# Altium PCB PCB1.PcbDoc
Units mm, origin at the board's own origin, x right, y up, seen from the top; angles counter-clockwise.
Board outline 40 x 35 mm, 2 copper layers (Top Layer, Bottom Layer), stack 1.6 mm thick; 41 components, 31 nets, 130 pads, 27 vias.
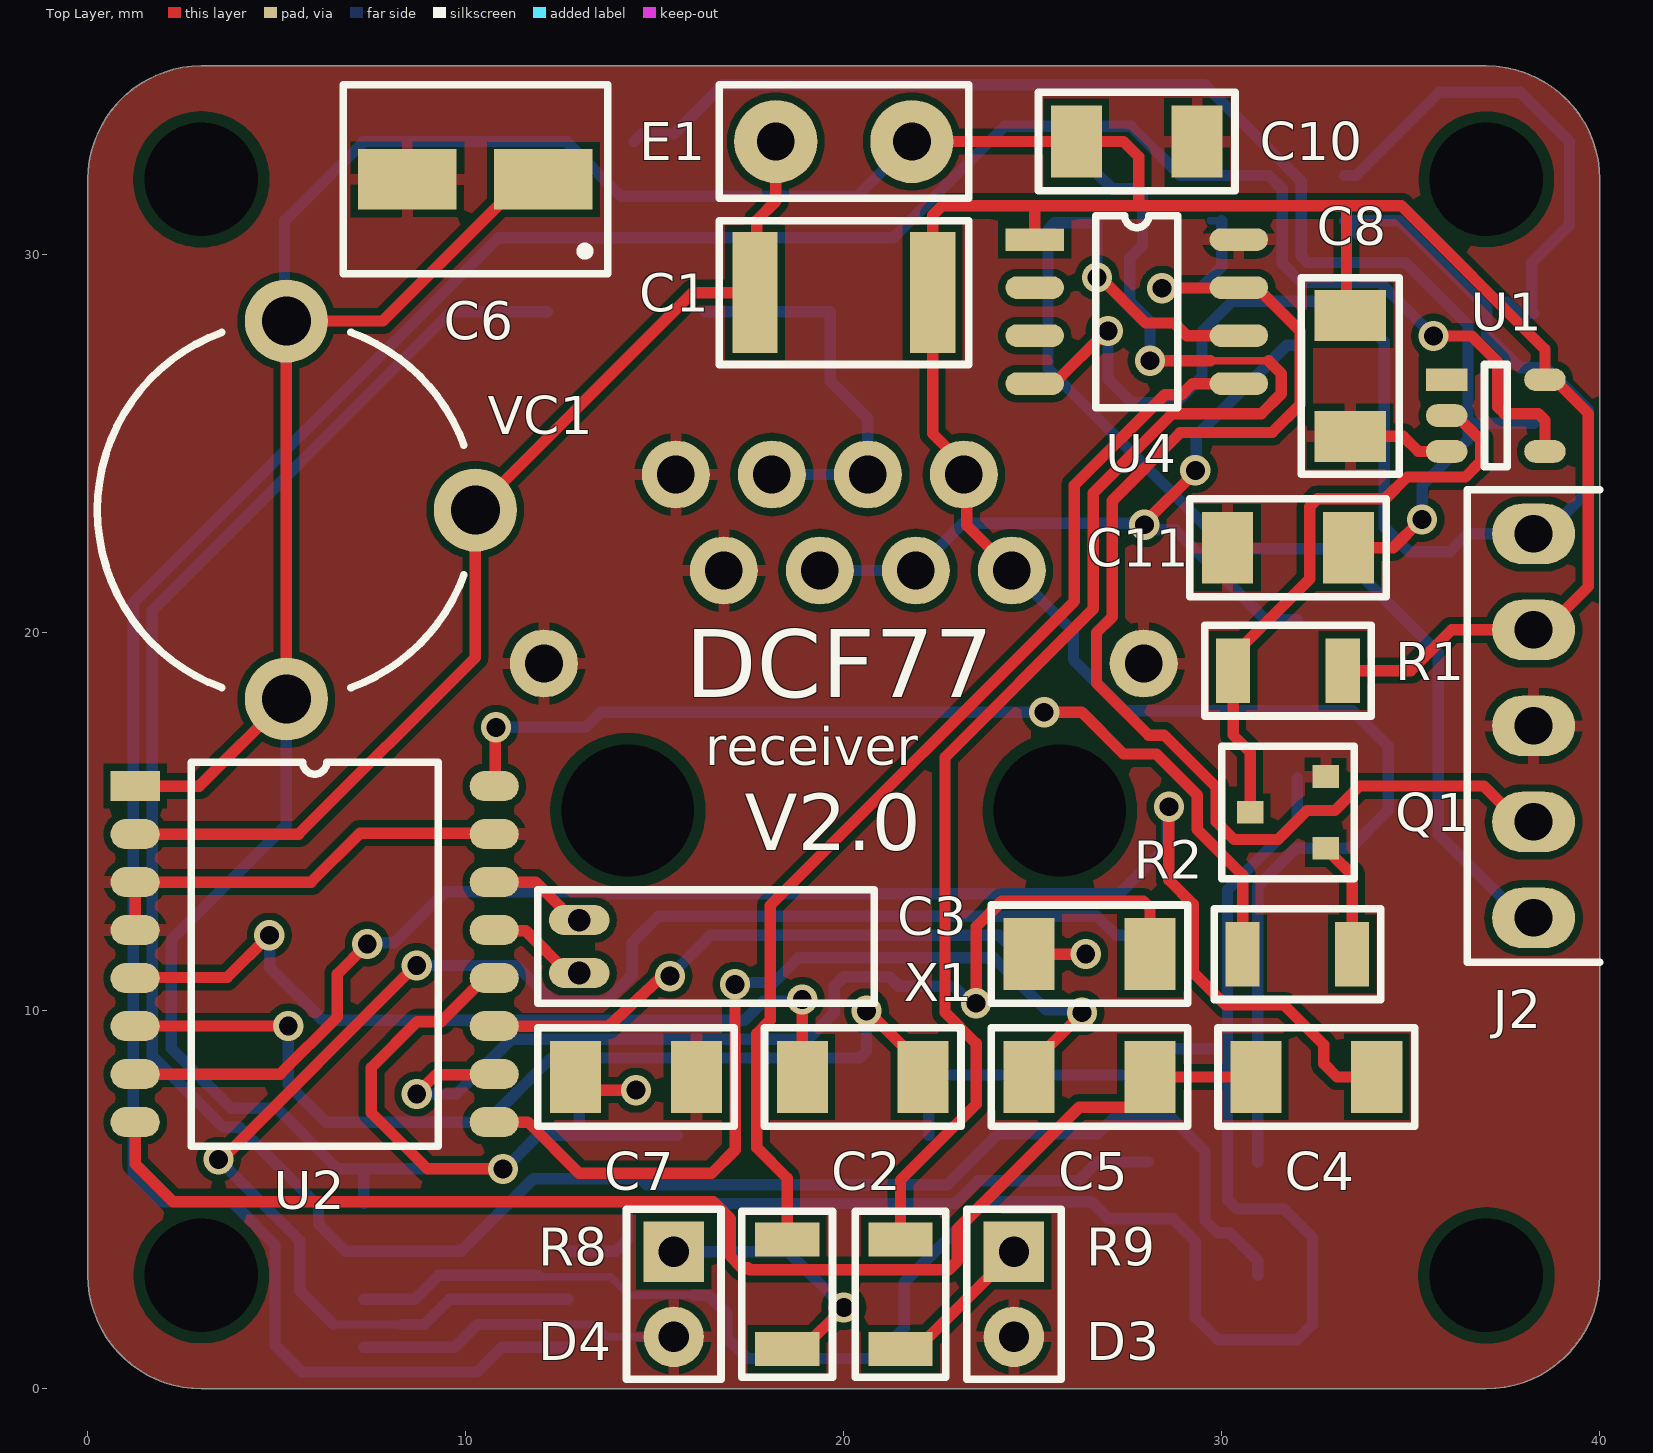
[diagram p0: Top Layer view]
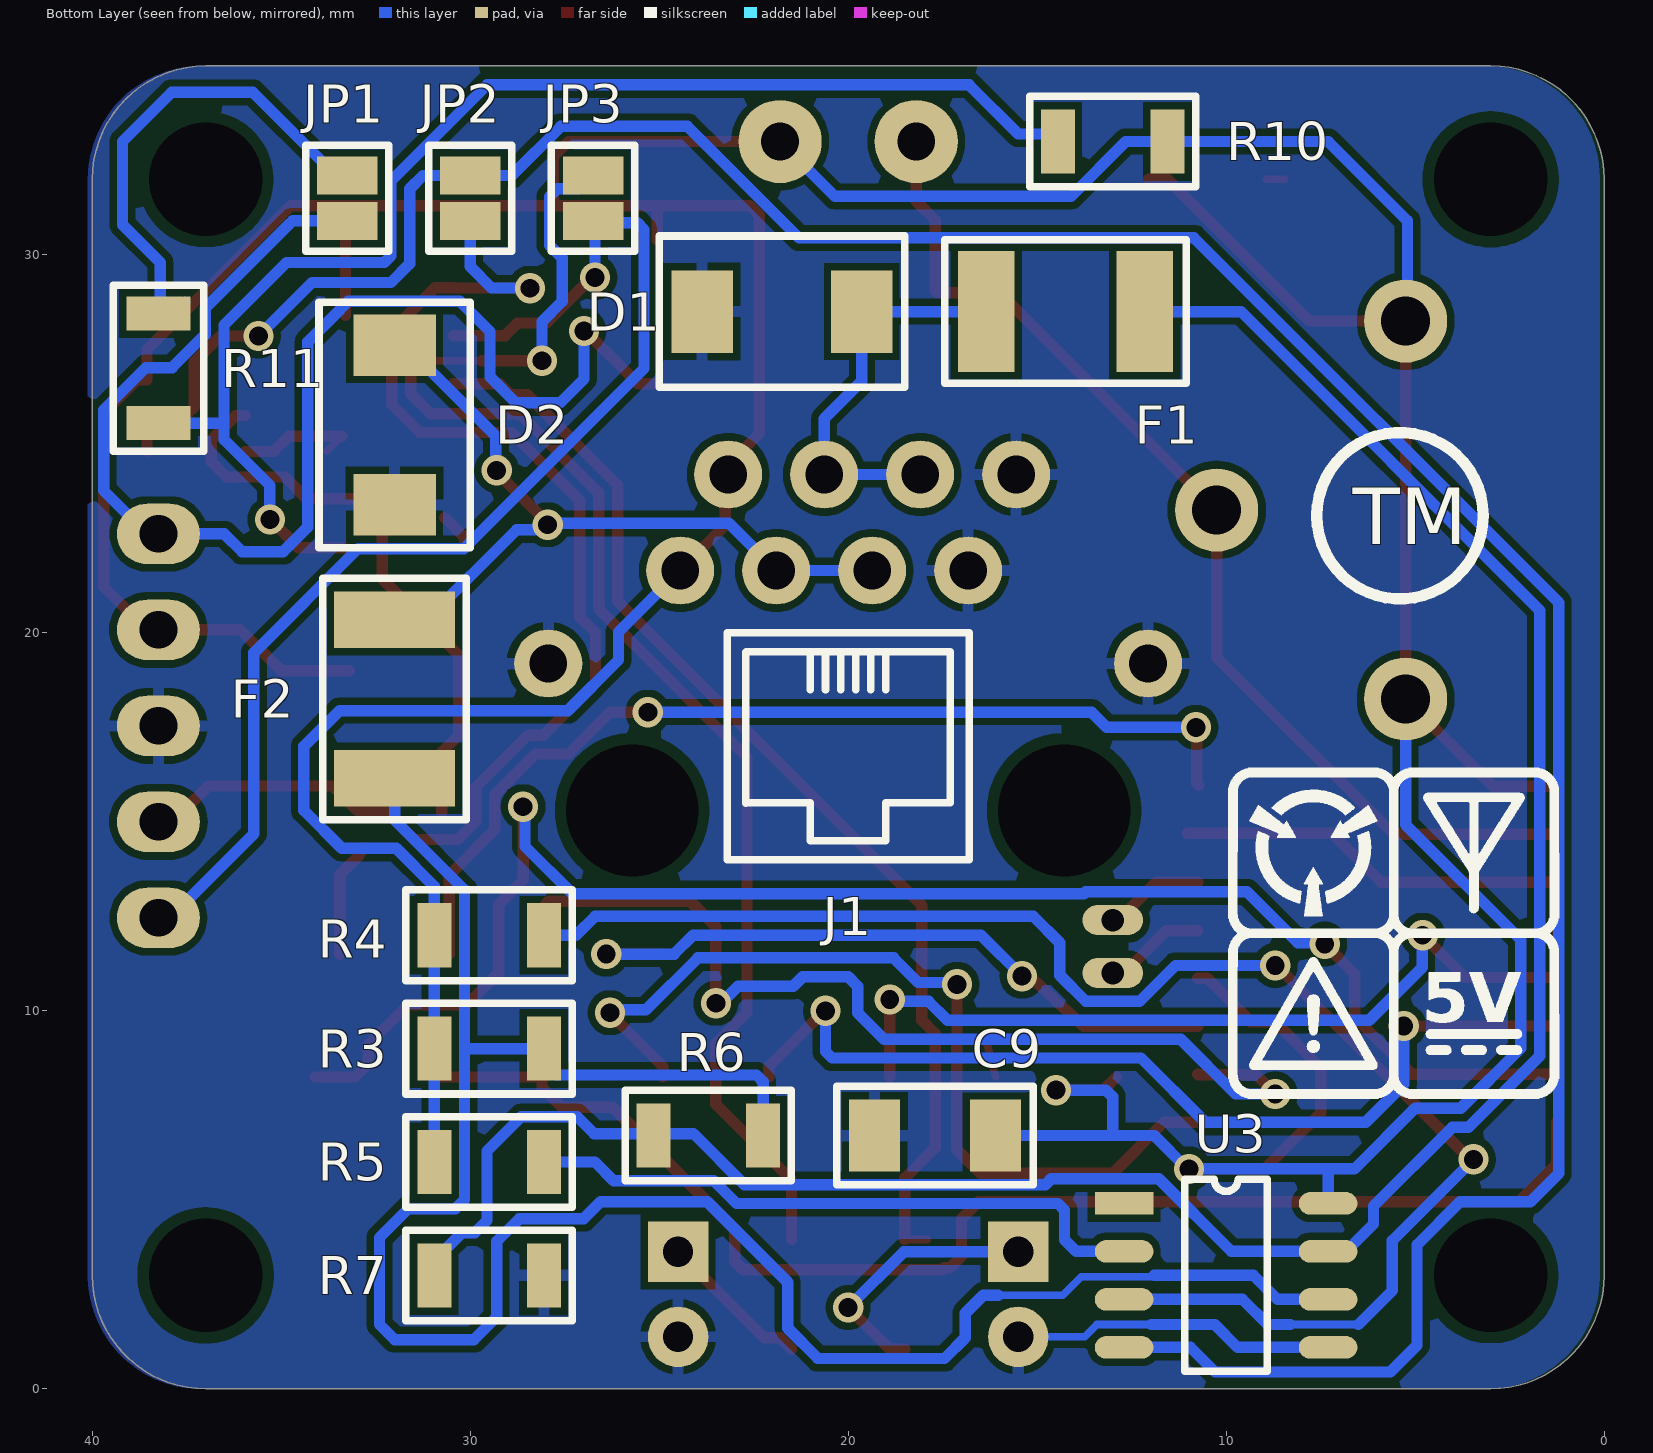
[diagram p1: Bottom Layer view, seen from below]
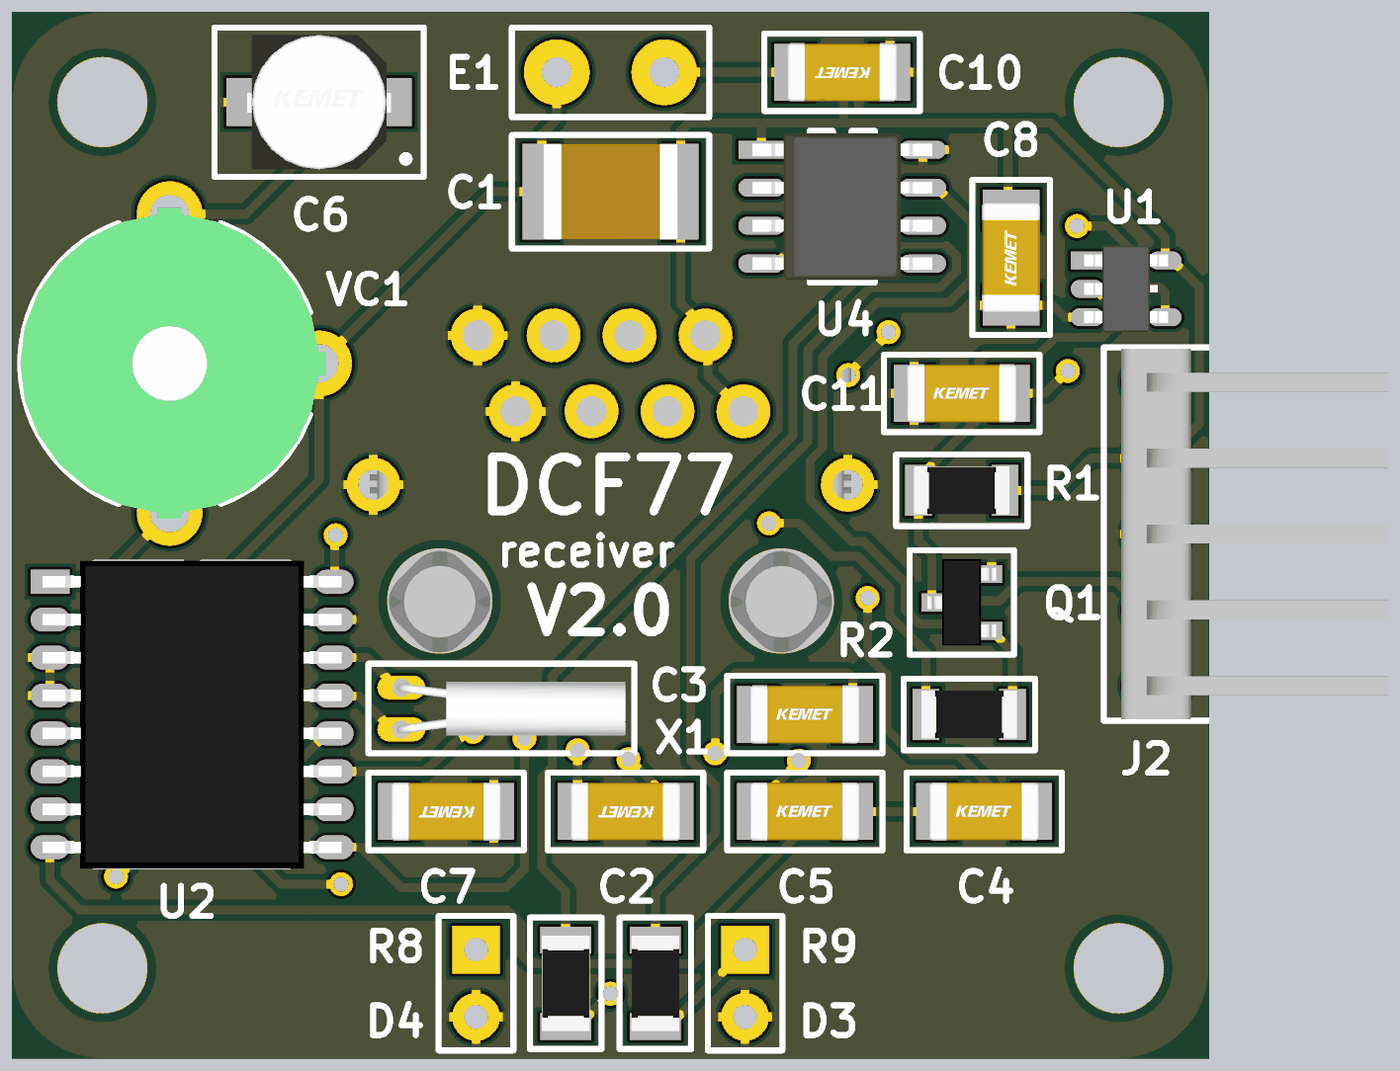
[diagram p2: 3D render of the assembled board from above, using the file's embedded part models]
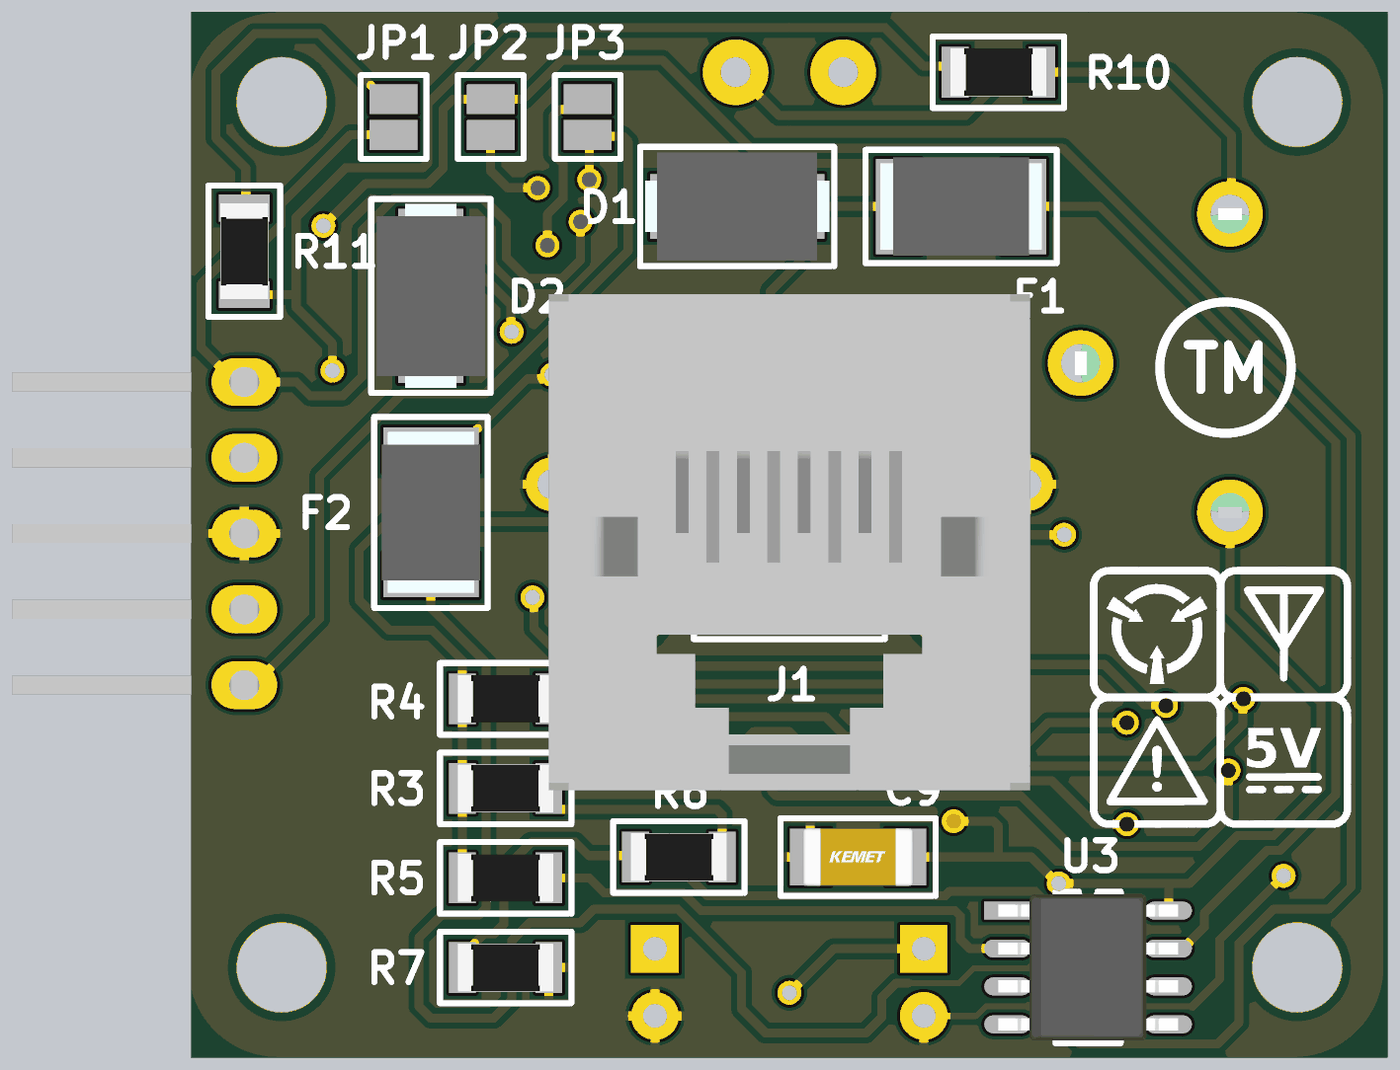
[diagram p3: 3D render of the assembled board from below, using the file's embedded part models]

## Layer stack, top to bottom
Top Solder: solder mask 0.0102, Solder Resist, Dk 3.5
Top Layer: signal copper 0.05
Dielectric 1: dielectric 1.5, FR-4, Dk 4.8
Bottom Layer: signal copper 0.05
Bottom Solder: solder mask 0.0102, Solder Resist, Dk 3.5

## Board outline
0,3 0,32 cw(c3,32) 3,35 37,35 cw(c37,32) 40,32 40,3 cw(c37,3) 37,0 3,0 cw(c3,3)

## Design rules (kind name [scope] priority, off if disabled: settings)
Clearance [All] p1: gap=0.2 ignorepadtopadclearanceinfootprint=FALSE except(0.3: Arc-Hole Track-Hole SMDPad-Hole THPad-Hole Via-Hole Fill-Hole Poly-Hole Region-Hole Text-Hole)
HoleSize [All] p1: absolutevalues=TRUE maxlimit=5 minlimit=0.025 maxpercent=80.000 minpercent=20.000
HoleToHoleClearance [All] p1: gap=0.2 allowstackedmicrovias=TRUE
MinimumSolderMaskSliver [All] p1: minsoldermaskwidth=0.15
PlaneConnect [All] p1: planeconnectstyle=Relief reliefexpansion=0.4 reliefentries=4 reliefconductorwidth=0.4 reliefairgap=0.3
PolygonConnect [All] p1: connectstyle=Relief reliefconductorwidth=0.3 reliefentries=4 polygonreliefangle="90 Angle" airgapwidth=0.2
RoutingVias [All] p1: holewidth=0.6 width=1 viastyle="Through Hole" minholewidth=0.5 minwidth=0.8 maxholewidth=0.6 maxwidth=1
SilkToSilkClearance [All] p1: silktosilkclearance=0.2
SilkToSolderMaskClearance [IsPad] p1: minsilkscreentomaskgap=0.2 clearancetoexposedcopper=TRUE
SolderMaskExpansion [All] p1: expansion=0.1 istentingtop=FALSE
Width [All] p1: maxlimit=0.3 minlimit=0.2 preferedwidth=0.3
24 further rules are at their usual default settings.

## Components (designator, comment, footprint, x,y, rotation, side; value= is the part's Value field where it differs from the comment)
C1 "Capacitator_film" FILM_CAPACITATOR 20,29 r0 top value=33nF
C2 "Capacitator_MLCC" MLCC_CAPACITATOR 20.5,8.25 r180 top value=10pF
C3 "Capacitator_MLCC" MLCC_CAPACITATOR 26.5,11.5 r0 top value=10nF
C4 "Capacitator_MLCC" MLCC_CAPACITATOR 32.5,8.25 r0 top value=6.8nF
C5 "Capacitator_MLCC" MLCC_CAPACITATOR 26.5,8.25 r0 top value=33nF
C6 "Capacitator_aluminium" CAPACITATOR_ALUMINIUM 10.25,32 r180 top value=10uF
C7 "Capacitator_MLCC" MLCC_CAPACITATOR 14.5,8.25 r180 top value=100nF
C8 "Capacitator_MLCC" MLCC_CAPACITATOR 33.4,26.8 r90 top value=100nF
C9 "Capacitator_MLCC" MLCC_CAPACITATOR 17.7,6.7 r180 bottom value=100nF
C10 "Capacitator_MLCC" MLCC_CAPACITATOR 27.75,33 r180 top value=100nF
C11 "Capacitator_MLCC" MLCC_CAPACITATOR 31.75,22.25 r0 top value=10nF
D1 "SMP75" SMP75 21.75,28.5 r0 bottom
D2 "SMP75" SMP75 32,25.5 r270 bottom
D3 "Indication_led" INDICATION_LED 24.5,2.5 r270 top
D4 "Indication_led" INDICATION_LED 15.5,2.5 r270 top
E1 "Ferrite_antenna" ANTENNA 20,33 r180 top value=128uH
F1 "PFMF.020.2" PFMF.020.2 14.25,28.5 r0 bottom
F2 "PFMF.020.2" PFMF.020.2 32,18.25 r90 bottom
J1 "Ethernet_connector" ETHERNET_CONNECTOR 20,17.5 r180 bottom
J2 "Programmer_port" Programmer_port 38.25,17.54 r0 top
JP1 "Jumper" JUMPER 33.25,31.5 r270 bottom
JP2 "Jumper" JUMPER 30,31.5 r270 bottom
JP3 "Jumper" JUMPER 26.75,31.5 r270 bottom
Q1 "BC847" BC847 31.75,15.25 r270 top
R1 "Resistor" RESISTOR 31.75,19 r0 top value=10k
R2 "Resistor" RESISTOR 32,11.5 r0 top value=100k
R3 "Resistor" RESISTOR 29.5,9 r0 bottom value=20k
R4 "Resistor" RESISTOR 29.5,12 r0 bottom value=10k
R5 "Resistor" RESISTOR 29.5,6 r0 bottom value=10k
R6 "Resistor" RESISTOR 23.7,6.7 r0 bottom value=120R
R7 "Resistor" RESISTOR 29.5,3 r0 bottom value=20k
R8 "Resistor" RESISTOR 21.5,2.5 r270 top value=330R
R9 "Resistor" RESISTOR 18.5,2.5 r90 top value=330R
R10 "Resistor" RESISTOR 13,33 r180 bottom value=10k
R11 "Resistor" RESISTOR 38.25,27 r90 bottom value=330R
U1 "SN74AHCT1G14" SN74AHCT1G14 37.25,25.75 r0 top
U2 "U4224B" U422B 6,11.5 r0 top
U3 "SN75176A" SN75176A 10,3 r180 bottom
U4 "PIC16F15214" PIC16F15214 27.75,28.5 r0 top
VC1 "Trimmer_capacitator" TRIMMER_CAPACITATOR 5.25,23.25 r90 top value="5.5pF - 40pF"
X1 "Crystal" CRYSTAL 13,11.7 r270 top value=77.5kHz

## Footprints (in the part's own frame and the unit in brackets; to place one, negate y for a bottom-side part, rotate by r counter-clockwise, add the part's x,y. Pads: shape width x height; smd on the part's side, far side on the other; paste and mask are expansions set on the pad)
ANTENNA [mm]
  round 2.2 hole 1: 1(-1.8,0) 2(1.8,0)
  silkscreen extent -3.3,-1.5 3.3,1.5
BC847 [mm]
  rect 0.6x0.7 smd: 1(0.95,1) 2(-0.95,1) 3(0,-1)
  silkscreen extent -1.75,-1.75 1.75,1.75, body extent -1.45,-1.15 1.45,1.15, height 1.01
CAPACITATOR_ALUMINIUM [mm]
  rect 2.6x1.6 smd: 1(-1.8,0) 2(1.8,0)
  silkscreen extent -3.5,-2.5 3.5,2.5, body extent -2.4,-2.25 2.4,2.25, height 5.66
CRYSTAL [mm]
  oval 0.8x1.6 hole 0.6: 1(-0.7,0) 2(0.7,0)
  silkscreen extent -1.5,-1.1 1.5,7.8, body extent -0.9,-0.15 0.89,7.5, height 1.8
ETHERNET_CONNECTOR [mm]
  round 1.8 hole 1: 1(-4.445,4.15) 2(-3.175,6.69) 3(-1.905,4.15) 4(-0.635,6.69) 5(0.635,4.15) 6(1.905,6.69) 7(3.175,4.15) 8(4.445,6.69) 9(-7.935,1.69) 10(7.935,1.69)
  round 0 hole 3.5: 22(-5.715,-2.2) 22(5.715,-2.2)
  silkscreen extent -3.2,-3.5 3.2,2.5, body extent -8.06,-8.57 8.06,8.07, height 16.83
FILM_CAPACITATOR [mm]
  rect 1.2x3.2 smd: 1(-2.35,0) 2(2.35,0)
  silkscreen extent -3.3,-1.9 3.3,1.9, body extent -2.25,-1.6 2.25,1.6, height 1
INDICATION_LED [mm]
  rect 1.6x1.6 hole 0.8: 1(-1.125,0)
  round 1.6 hole 0.8: 2(1.125,0)
  silkscreen extent -2.25,-1.25 2.25,1.25
JUMPER [mm]
  rect 1x1.6 smd: 1(-0.6,0) 2(0.6,0)
  silkscreen extent -1.4,-1.1 1.4,1.1
MLCC_CAPACITATOR [mm]
  rect 1.35x1.9 smd: 1(-1.6,0) 2(1.6,0)
  silkscreen extent -2.6,-1.3 2.6,1.3, body extent -1.85,-0.97 1.85,0.98, height 1.21
PFMF.020.2 [mm]
  rect 1.5x3.2 smd: 1(-2.1,0) 2(2.1,0)
  silkscreen extent -3.2,-1.9 3.2,1.9, body extent -2.7,-1.65 2.7,1.65, height 1.2
PIC16F15214 [mm]
  rect 1.55x0.6 smd: 1(-2.7,1.905)
  oval 1.55x0.6 smd: 2(-2.7,0.635) 3(-2.7,-0.635) 4(-2.7,-1.905) 5(2.7,-1.905) 6(2.7,-0.635) 7(2.7,0.635) 8(2.7,1.905)
  silkscreen extent -1.09,-2.54 1.09,2.54, body extent -3.01,-2.45 3.01,2.45, height 1.63
Programmer_port [mm]
  oval 2.2x1.6 hole 1: 1(0,5.08) 2(0,2.54) 3(0,0) 4(0,-2.54) 5(0,-5.08)
  silkscreen extent -1.75,-6.25 1.75,6.25, body extent -1.17,-6.2 7.77,6.2, height 6.68
RESISTOR [mm]
  rect 0.9x1.7 smd: 1(-1.45,0) 2(1.45,0)
  silkscreen extent -2.2,-1.2 2.2,1.2, body extent -1.6,-0.8 1.6,0.8, height 0.56
SMP75 [mm]
  rect 1.62x2.18 smd: 1(-2.11,0) 2(2.11,0)
  silkscreen extent -3.25,-2 3.25,2, body extent -3.08,-1.81 3.09,1.81, height 2.75
SN74AHCT1G14 [mm]
  rect 1.1x0.6 smd: 1(-1.3,0.95)
  oval 1.1x0.6 smd: 2(-1.3,0) 3(-1.3,-0.95) 4(1.3,-0.95) 5(1.3,0.95)
  silkscreen extent -0.3,-1.35 0.3,1.35, body extent -1.4,-1.45 1.4,1.45, height 1.2
SN75176A [mm]
  rect 1.55x0.6 smd: 1(-2.7,1.905)
  oval 1.55x0.6 smd: 2(-2.7,0.635) 3(-2.7,-0.635) 4(-2.7,-1.905) 5(2.7,-1.905) 6(2.7,-0.635) 7(2.7,0.635) 8(2.7,1.905)
  silkscreen extent -1.09,-2.54 1.09,2.54, body extent -3.01,-2.45 3.01,2.45, height 1.63
TRIMMER_CAPACITATOR [mm]
  round 2.2 hole 1.3: 1(-5,0) 1(5,0) 2(0,-5)
  silkscreen extent -4.7,-4.7 4.7,5, body extent -5.2,-5.2 5.2,5, height 11.01
U422B [mm]
  rect 1.3x0.8 smd: 1(-4.75,4.445)
  oval 1.3x0.8 smd: 2(-4.75,3.175) 3(-4.75,1.905) 4(-4.75,0.635) 5(-4.75,-0.635) 6(-4.75,-1.905) 7(-4.75,-3.175) 8(-4.75,-4.445) 9(4.75,-4.445) 10(4.75,-3.175) 11(4.75,-1.905) 12(4.75,-0.635) 13(4.75,0.635) 14(4.75,1.905) 15(4.75,3.175) 16(4.75,4.445)
  silkscreen extent -3.26,-5.08 3.27,5.08, body extent -5,-5.15 5,5.15, height 2.2

## Part data
C1: "Film capacitator", Supplier Part Number 1=505-SMDID02330KA00KP, Supplier 1=Mouser
C2 C3 C4 C5 C7 C8 C9 C10 C11: "MLCC capacitator - 1206"
C6: "Aluminum capacitator - filtration", Supplier 1=Mouser, Supplier 2=Mouser, Supplier 3=Mouser, Supplier Part Number 3=80-EDK106M035A9BAA
D1 D2: "Bidirectional crowbar protection", Supplier Part Number 1=511-SMP75-8, Supplier 1=Mouser
D3 D4: "Indication led to panel", Supplier Part Number 1=593-L63DR2L, Supplier 1=Mouser
E1: "Ferrite antenna"
F1 F2: "SMD fuse", Supplier Part Number 1=693-PFMF.020.2, Supplier 1=Mouser
J1: "Ethernet connector", Supplier Part Number 1=571-6368150-1, Supplier 1=Mouser
J2: "Programmer port for PIC"
JP1 JP2 JP3: "Solderable jumper"
Q1: "NPN transistor", Supplier Part Number 1=771-BC847215, Supplier 1=Mouser
R1 R2 R3 R4 R5 R6 R7 R8 R9 R10 R11: "SMD resistor - 1206"
U1: "SINGLE SCHMITT-TRIGGER INVERTER GATE", Supplier Part Number 1=595-SN74AHCT1G14DBVR, Supplier 1=Mouser
U2: "DCF77 signal decoder"
U3: "RS485 transreciever", Supplier Part Number 1=595-SN75176ADR, Supplier 1=Mouser
U4: "8-bit microcontroller", Supplier Part Number 1=579-PIC16F15214-I/SN, Supplier 1=Mouser
VC1: "Film dielectric trimmer", Supplier Part Number 1=594-2222-808-31409, Supplier 1=Mouser
X1: "Quartz crystal"

## Free pads (board coordinates)
  round 0 hole 3: 36(3,3) 36(3,32) 36(37,3) 36(37,32)

## Via types
v1: diameter 0.8, hole 0.5, Top Layer to Bottom Layer, 27 vias

## Nets (pads, with @x,y where several pads share a name; then routed paths per layer and width w, separated by ;. In a path a pad name is that pad's centre, name@x,y a point inside that pad or via, vN(x,y) a via of type N, cw(c..) or ccw(c..) an arc to the next point about the centre after c; other vN are vias at no path point)
GND: C6.2 C7.1 C8.1 C9.1 C10.1 C11.1 D1.2 D2.2 D3.2 D4.2 J1.7 J1.8 J1.9 J1.10 J2.3 Q1.2 R7.1 U1.3 U2.3 U2.4 U2.15 U3.5 U4.8 | length 26
  Top Layer w0.2: C6.2 C6.2@8.941,32 ; C7.1 C7.1@16.32,9.1 ; C8.1 C8.1@33.8,24.8
  Top Layer w0.3: U2.4 U2.3 5.905,13.405 7.2,14.7 U2.15@11.025,14.7 ; C11.1 30.15,22.525 C11.1@30.675,23.05 ; C8.1 34.8,25.2 35.2,24.8 U1.3
  Bottom Layer w0.2: 11.985,1.7 13.419,1.7 13.744,1.375 D4.2 ; D3.2@24.342,1.375 D3.2
  Bottom Layer w0.3: U3.5 9.695,1.095 10.3,1.7 11.985,1.7
NetC1_1: C1.1 E1.2 U2.2 VC1.2 | length 28.8
  Top Layer w0.3: U2.2 5.575,14.675 10.25,19.35 VC1.2 16,29 C1.1 17.7,29.05 17.7,30.921 18.2,31.421 E1.2
NetC2_1: C2.1 U2.6 | length 25.6
  Top Layer w0.3: U2.6 1.252,9.598 5.298,9.598 v1(5.3,9.6) ; v1(20.6,10) 20.625,10 22.1,8.525 C2.1
  Bottom Layer w0.3: v1(5.3,9.6) 5.3,8.054 6.304,7.05 10.55,7.05 12.25,8.75 20.424,8.75 20.6,8.926 v1(20.6,10)
NetC2_2: C2.2 U2.5 | length 21.8
  Top Layer w0.3: U2.5 1.267,10.883 3.683,10.883 v1(4.8,12) ; C2.2 v1(18.9,10.3)
  Bottom Layer w0.3: v1(4.8,12) 4.811,11.989 4.811,11.15 6.211,9.75 17.372,9.75 17.872,10.25 18.85,10.25 v1(18.9,10.3)
NetC3_1: C3.1 U2.11 | length 18.4
  Top Layer w0.3: U2.11 13.771,9.595 15.309,11.016 15.4,10.925 v1(15.4,10.917) ; C3.1 v1(26.4,11.5)
  Bottom Layer w0.3: v1(15.4,10.917) 16.483,12 24.105,12 24.605,11.5 v1(26.4,11.5)
NetC3_2: C3.2 U2.10 | length 27.3
  Top Layer w0.3: v1(8.7,7.8) 9.213,8.313 10.737,8.313 U2.10 ; v1(23.5,10.2) 23.5,12.22 24.18,12.9 27.924,12.9 28.1,12.724 C3.2
  Bottom Layer w0.3: v1(8.7,7.8) 9.75,7.8 11.2,9.25 19.052,9.25 19.75,9.948 19.75,10.652 19.998,10.9 21.202,10.9 21.452,10.65 22.915,10.65 23.365,10.2 v1(23.5,10.2)
NetC4_1: C4.1 C5.2 U2.8 | length 35.3
  Top Layer w0.3: U2.8 1.25,5.95 2.25,4.95 16.55,4.95 17.001,4.499 17.001,3.499 17.3,3.2 17.455,3.2 17.505,3.15 22.774,3.15 23,3.376 23,4.22 26.23,7.45 27.575,7.45 28.1,7.975 C5.2 C4.1
NetC4_2: C4.2 U2.7 | length 42.5
  Top Layer w0.3: U2.7 5.086,8.325 6.6,9.839 6.6,10.976 v1(7.391,11.767) ; v1(28.6,15.4) 28.6,13.46 29.244,12.815 29.244,11.011 30.1,10.155 31.645,10.155 32.7,9.1 32.7,8.6 33.05,8.25 C4.2
  Bottom Layer w0.3: v1(7.391,11.767) 7.426,11.802 8.102,11.802 9.45,13.15 13.711,13.15 13.761,13.1 27.3,13.1 28.549,14.349 28.549,15.349 v1(28.6,15.4)
NetC5_1: C5.1 U2.9 | length 23.9
  Top Layer w0.3: U2.9 11.645,7.055 13,5.7 16.5,5.7 17.125,6.325 17.125,9.345 17.12,9.35 v1(17.12,10.7) ; C5.1 24.9,8.525 26.3,9.925 v1(26.3,9.95)
  Bottom Layer w0.3: v1(17.12,10.7) 17.17,10.75 18.148,10.75 18.798,11.4 23.977,11.4 25.35,10.027 26.223,10.027 v1(26.3,9.95)
NetC11_2: C11.2 R10.1 R11.1 | length 36.1
  Top Layer w0.3: C11.2 34.536,22.25 35.286,23 v1(35.3,23)
  Bottom Layer w0.3: R10.1 14.65,33.2 15.5,33.2 16.8,34.5 29.557,34.5 32.1,31.957 32.1,29.976 32.276,29.8 34.856,29.8 36.513,28.143 36.513,25.6 ; v1(35.3,23) 35.3,23.9 36.513,25.113 36.513,25.6 ; R11.1 36.563,25.55 36.513,25.6
NetD1_1: D1.1 F1.2 J1.4 J1.6 | length 10.6
  Bottom Layer w0.3: F1.2 D1.1 19.64,26.66 20.635,25.665 J1.4 J1.6
NetD2_1: D2.1 F2.2 J1.3 J1.5 | length 20.9
  Top Layer w0.3: v1(27.95,22.86) 27.95,22.905 29.3,24.255 v1(29.3,24.3)
  Bottom Layer w0.3: J1.5 J1.3 23.155,22.9 27.91,22.9 v1(27.95,22.86) ; v1@27.851,22.86 27.985,22.726 28.774,22.726 31.15,20.35 F2.2 ; v1(29.3,24.3) 29.323,24.323 29.323,25.213 31.06,26.95 31.72,27.61 D2.1
NetD3_1: D3.1 R8.2 | length 4.1
  Top Layer w0.3: R8.2 21.8,1.35 22.225,1.35 D3.1
NetD4_1: D4.1 R9.1 | length 7.9
  Top Layer w0.3: R9.1 18.9,1.05 v1(20,2.15)
  Bottom Layer w0.2: D4.1 D4.1@16.083,3.042
  Bottom Layer w0.3: D4.1 18.525,3.625 v1(20,2.15)
NetF1_1: F1.1 R6.2 R7.2 U3.7 | length 61.8
  Bottom Layer w0.3: F1.1 9.607,28.5 1.7,20.593 1.7,8.806 3.585,6.921 4.014,6.921 6.1,4.835 6.1,4.36 6.825,3.635 9.86,3.635 11.78,5.555 14.625,5.555 14.78,5.4 22.745,5.4 24.095,6.75 25.15,6.75 26.722,6.75 27.172,7.2 28.645,7.2 29.557,6.288 29.557,4.45 29.883,4.124 30.226,4.124 30.95,3.4 R7.2
NetF2_1: F2.1 R3.1 R6.1 U3.6 | length 58.7
  Bottom Layer w0.2: 11.9,3 11.935,2.965 13.835,2.965 14.325,2.475 15.956,2.475 ; 15.956,2.475 16.026,2.475
  Bottom Layer w0.3: U3.6 8.639,2.365 9.274,3 11.9,3 ; 16.026,2.475 16.425,2.475 16.9,2 16.9,1.349 17.449,0.8 20.8,0.8 21.6,1.6 21.6,2.82 23.73,4.95 26.55,4.95 27,4.5 28.7,4.5 29.3,3.9 29.3,1.9 29.9,1.3 32,1.3 32.4,1.7 32.4,4 31.643,4.757 30.398,4.757 30.15,5.005 30.15,8.577 30.15,9 ; R6.1 22.25,8.124 22.426,8.3 27.75,8.3 28.05,8.6 R3.1 30.15,9 ; F2.1 32,15.05 30.15,13.2 30.15,9
NetJ2_1: J2.1 JP1.2 U4.4 | length 36.4
  Top Layer w0.3: U4.4 25.56,26.595 26.955,27.99 v1(26.99,27.99)
  Bottom Layer w0.3: v1(26.99,27.99) 26.99,26.72 27.626,26.084 28.784,26.084 29.476,26.776 29.476,27.976 30.27,28.77 33.235,28.77 33.44,28.565 33.44,28.56 34.3,27.7 34.3,22.798 34.948,22.15 36.038,22.15 36.508,22.62 J2.1 38.55,22.62 39.7,23.77 39.7,25.895 38.577,27.018 37.887,27.018 37.013,27.892 37.013,28.587 34.799,30.801 34.7,30.9 JP1.2 JP1.2@33.6,30.55
NetJ2_4: J2.4 JP2.2 U4.7 | length 35.4
  Top Layer w0.3: v1(28.418,29.118) 28.426,29.126 30.441,29.126 U4.7 30.925,29.135 32.075,27.985 32.075,26.044 31.331,25.3 28.905,25.3 27.1,23.495 27.1,20.423 26.685,20.008 26.685,18.672 28.062,17.295 28.473,17.295 29.85,15.918 29.85,15.005 30.322,14.533 31.483,14.533 32.25,15.3 32.995,15.3 33.645,15.95 36.932,15.95 37.882,15 J2.4
  Bottom Layer w0.2: v1(28.418,29.118) v1@28.418,29.334 ; JP2.2@29.7,30.9 JP2.2
  Bottom Layer w0.3: v1(28.418,29.118) 28.426,29.126 29.434,29.126 30,29.693 JP2.2
NetJ2_5: J2.5 JP3.2 U4.6 | length 32.6
  Top Layer w0.3: v1(26.7,29.4) 26.783,29.4 27.983,28.2 28.742,28.2 29.077,27.865 U4.6
  Bottom Layer w0.3: v1(26.7,29.4) 26.7,30.85 25.576,30.85 25.4,30.674 25.4,26.998 30.168,22.23 32.965,22.23 35.723,19.472 35.723,14.687 37.95,12.46 J2.5
NetJP1_1: JP1.1 R11.2 | length 13.2
  Bottom Layer w0.3: JP1.1 33.55,32.1 35.75,34.3 37.9,34.3 39.2,33 39.2,30.8 38.2,29.8 38.2,28.5 R11.2 37.85,28.45 37.762,28.538 37.566,28.734 R11.2@37.544,28.756
NetJP2_1: JP2.1 U1.4 U3.4 | length 79.1
  Top Layer w0.3: v1@35.603,27.853 36.613,27.853 37.3,27.165 37.3,25.976 37.476,25.8 38.374,25.8 38.55,25.624 U1.4
  Bottom Layer w0.3: U3.4 10.941,1.095 10.291,0.445 5.655,0.445 4.95,1.15 4.95,3.808 3.808,4.95 1.95,4.95 1.2,5.7 1.2,20.8 10.85,30.45 21.301,30.45 24.251,33.4 27.6,33.4 28.9,32.1 JP2.1 31.25,32.1 31.6,31.75 31.6,29.769 32.099,29.27 34.184,29.27 v1(35.602,27.852)
NetJP3_1: JP3.1 R8.1 | length 38.8
  Top Layer w0.2: 29.7,27.2 31.239,27.2
  Top Layer w0.3: R8.1 21.5,5.525 23.5,7.525 23.5,9.139 22.675,9.964 22.675,16.705 26.6,20.63 26.6,23.703 28.697,25.8 31.049,25.8 31.575,26.326 31.575,26.864 31.239,27.2 ; v1(28.1,27.2) 28.102,27.198 29.698,27.198 29.7,27.2
  Bottom Layer w0.3: JP3.1 27.1,31.75 27.695,31.75 27.9,31.545 27.9,30.255 27.568,29.922 27.568,28.765 28.1,28.233 v1(28.1,27.2)
NetQ1_1: Q1.1 R2.2 | length 3.1
  Top Layer w0.3: Q1.1 32.8,14.3 32.95,14.15 32.95,14.1 33.45,13.6 R2.2
NetQ1_3: Q1.3 R1.1 U1.2 | length 15.9
  Top Layer w0.3: Q1.3 30.75,16.85 30.3,17.3 R1.1 30.3,19.4 32.325,21.425 32.325,21.689 32.325,23.345 32.53,23.55 34.324,23.55 34.9,24.126 36.445,24.126 36.85,24.531 36.85,25.1 36.2,25.75 U1.2
NetR2_1: R2.1 U2.16 | length 25.9
  Top Layer w0.2: U2.16@10.725,15.97 U2.16
  Top Layer w0.3: U2.16@10.725,15.97 10.775,16.02 10.775,17.475 v1(10.8,17.5) ; v1(25.3,17.9) 26.298,17.9 27.403,16.795 28.266,16.795 29.35,15.711 29.35,14.798 30.55,13.598 R2.1
  Bottom Layer w0.3: v1(10.8,17.5) 13.158,17.5 13.558,17.9 v1(25.3,17.9)
NetR4_1: R4.1 U3.3 | length 41.4
  Top Layer w0.3: v1(3.454,6.071) 3.538,6.071 8.668,11.2 v1(8.7,11.2)
  Bottom Layer w0.2: 6.5,1.7 8.3,1.7 ; R4.1@28.05,11.417 R4.1
  Bottom Layer w0.3: v1(3.454,6.071) 5.6,3.925 5.6,2.6 6.5,1.7 ; 8.3,1.7 8.9,1.7 9.565,2.365 U3.3 ; v1(8.7,11.2) 11.339,11.2 12.289,10.25 13.711,10.25 14.4,10.939 14.4,11.8 15.1,12.5 26.7,12.5 27.2,12 R4.1
NetR5_1: R5.1 U3.2 | length 16.8
  Bottom Layer w0.3: U3.2 13.966,3.635 14.275,3.944 14.275,4.724 14.451,4.9 22.952,4.9 23.552,5.5 26.2,5.5 26.7,6 27.854,6 R5.1
NetR9_2: R9.2 U4.5 | length 29.8
  Top Layer w0.2: R9.2@17.907,3.95 R9.2
  Top Layer w0.3: R9.2 18.5,5.575 17.7,6.375 17.7,9.4 18.05,9.75 18.05,12.787 26.1,20.837 26.1,23.91 28.49,26.3 28.93,26.3 29.225,26.595 U4.5
NetU2_13: U2.13 X1.2 | length 2.7
  Top Layer w0.3: U2.13 10.767,12.118 11.585,12.118 12.703,11 X1.2
NetU2_14: U2.14 X1.1 | length 2.7
  Top Layer w0.3: U2.14 11.85,13.405 12.504,12.751 12.504,12.631 12.735,12.4 X1.1
VCC: C1.2 C6.1 C7.2 C8.2 C9.2 C10.2 E1.1 J1.1 J1.2 J2.2 R1.2 R3.2 R4.2 R5.2 R10.2 U1.5 U2.1 U2.12 U3.8 U4.1 VC1.1 | length 164.2
  Top Layer w0.3: U2.1 2.945,15.945 5.25,18.25 5.25,28.25 7.8,28.25 11.55,32 C6.1 ; U2.12 10.5,10.865 9.346,9.711 8.711,9.711 7.5,8.5 7.5,7.3 8.982,5.818 v1(10.982,5.818) ; C7.2 13.25,7.9 v1(14.5,7.9) ; E1.1 C10.2 27.4,33 27.8,32.6 27.8,31.35 27.85,31.3 ; J1.1 23.255,22.84 23.255,24.11 J1.2 23.175,24.449 22.35,25.274 C1.2 22.35,31.05 22.6,31.3 25.1,31.3 ; U4.1 25.05,31.25 25.1,31.3 ; R1.2 35,19 36.08,20.08 38.55,20.08 39.7,21.23 39.7,25.8 38.8,26.7 U1.5 38.55,27.5 34.75,31.3 33.3,31.3 ; C8.2@33.3,28.4 33.3,31.3 ; 25.1,31.3 27.85,31.3 ; 27.85,31.3 33.3,31.3
  Bottom Layer w0.3: VC1.1@5.25,18.25 5.25,14.924 2.2,11.874 2.2,9.013 3.792,7.421 4.999,7.421 6.602,5.818 7.3,5.818 ; VC1.1@5.25,28.25 5.2,28.3 5.2,30.9 7.3,33 R10.2 12.655,33 14.105,31.55 20.35,31.55 E1.1 ; U3.8 7.3,5.818 ; v1@10.841,5.818 7.3,5.818 ; v1(10.982,5.818) 11.018,5.818 11.9,6.7 13,6.7 ; v1(14.5,7.9) 13.176,7.9 13,7.724 13,6.7 ; C9.2@15.6,6.7 13,6.7 ; J1.1 26.075,20.02 26.075,19.283 27.417,17.94 33.46,17.94 34.4,17 34.4,15.3 33.4,14.3 31.957,14.3 30.95,13.293 R3.2 R5.2
pads on no net: J1.22 U1.1 U3.1 U4.2 U4.3

## Polygon pours and split planes (outlines as drawn)
no net on Mechanical 16 "GND_L01_P-001" (none): 0,3 0,32 cw(c3,32) 3,35 37,35 cw(c37,32) 40,32 40,3 cw(c37,3) 37,0 3,0 cw(c3,3)
GND on Top Layer "GND_L01_P-001" (solid, pour order 2): 0,3 0,32 cw(c3,32) 3,35 37,35 cw(c37,32) 40,32 40,3 cw(c37,3) 37,0 3,0 cw(c3,3)
GND on Bottom Layer "GND_L01_P-001" (solid, pour order 3): 0.114,3 0.114,32 cw(c3.114,32) 3.114,35 37.114,35 cw(c37.114,32) 40.114,32 40.114,3 cw(c37.114,3) 37.114,0 3.114,0 cw(c3.114,3)

## Silkscreen, mask and mechanical layers (free items; w line width, h text height)
Top Overlay:
  text "DCF77" at 15.801,18.3 h1.8
  text "receiver" at 16.335,16.5 h1
  text "V2.0" at 17.376,14.25 h1.5
Bottom Overlay:
  drawing of 18 lines, arcs and shapes, not listed
  text "TM" at 6.65,22.35 h1.5